# Altium PCB Advanced Clock.PcbDoc (part 6 of 7)
Units mil, origin at the board's own origin, x right, y up, seen from the top; angles counter-clockwise.
Board outline 3854 x 3880 mil, 2 copper layers (Top Layer, Bottom Layer); 117 components, 90 nets, 504 pads, 209 vias.
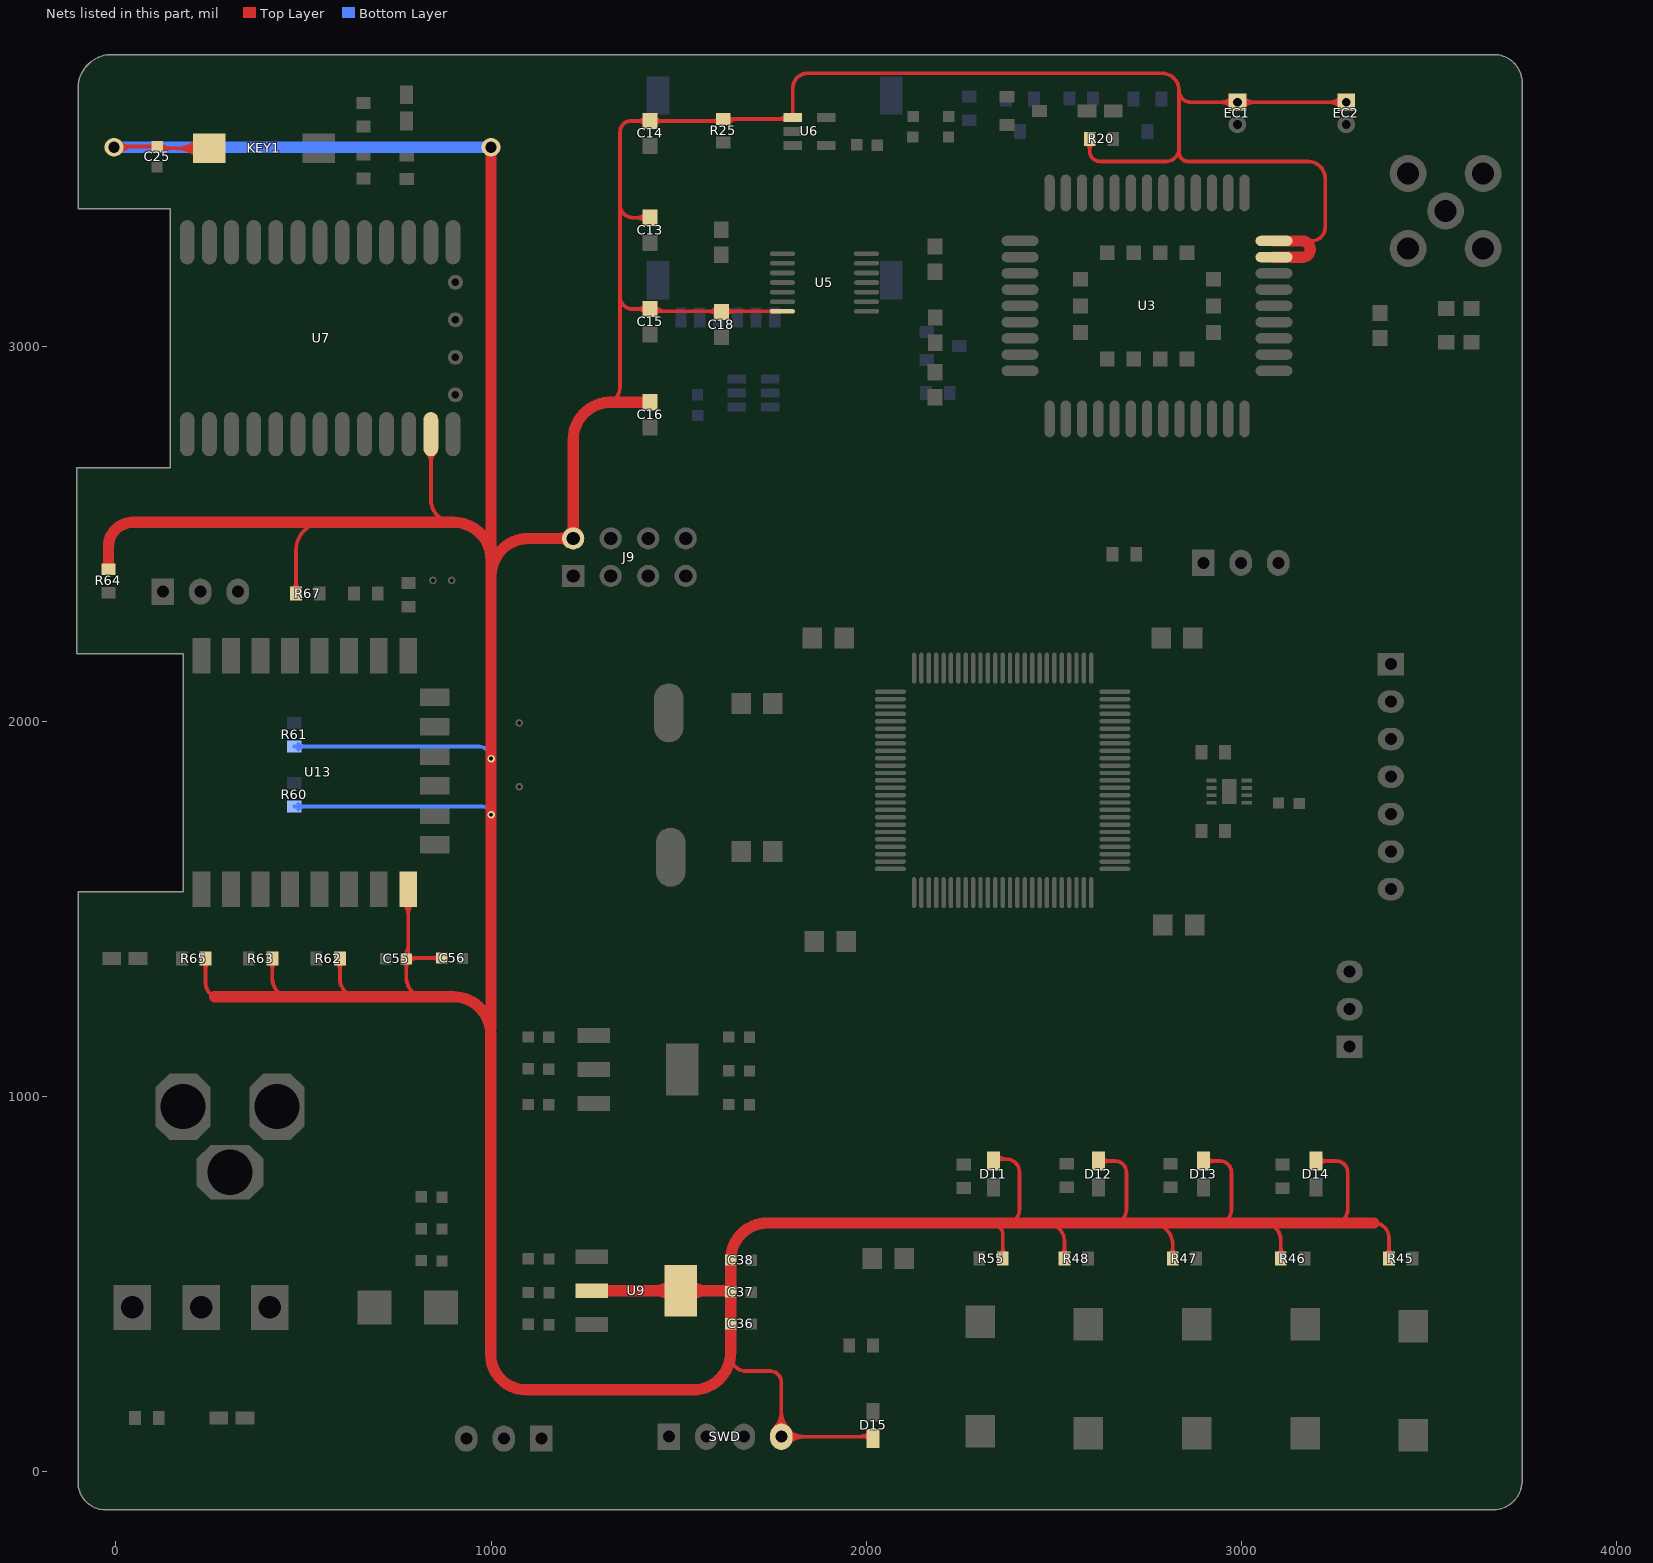
[diagram p6: the nets of this part, all layers, seen from the top]

## Via types
v1: diameter 20, hole 12, Top Layer to Bottom Layer, 133 vias
v2: diameter 20, hole 10, Top Layer to Bottom Layer, 30 vias
v3: diameter 15, hole 7, Top Layer to Bottom Layer, 26 vias
v4: diameter 30, hole 20, Top Layer to Bottom Layer, 11 vias
v5: diameter 138, hole 137.8, Top Layer to Bottom Layer, 4 vias
v6: diameter 50, hole 30, Top Layer to Bottom Layer, 4 vias
v7: diameter 40, hole 20, Top Layer to Bottom Layer, 1 vias

## Nets (pads, with @x,y where several pads share a name; then routed paths per layer and width w, separated by ;. In a path a pad name is that pad's centre, name@x,y a point inside that pad or via, vN(x,y) a via of type N, cw(c..) or ccw(c..) an arc to the next point about the centre after c; other vN are vias at no path point) (continued)
VCC3V3: C13.2 C14.2 C15.2 C16.2 C18.1 C25.2 C36.2 C37.2 C38.2 C55.2 C56.2 D11.A D12.A D13.A D14.A D15.A EC1.1 EC2.1 J9.2 KEY1.1 R20.2 R25.1 R45.1 R46.1 R47.1 R48.1 R55.2 R60.2 R61.2 R62.2 R63.2 R64.1 R65.1 R67.1 SWD.4 U3.43 U3.44 U5.14 U6.1 U7.12 U9.2 U9.4 U13.16 | length 34932.7
  Top Layer w10: v6@-2.79,3532.21 C25.2@110.35,3532.21 ; C25.2@115.57,3527 KEY1.1@249,3527 ; R65.1@239,1367 239,1302 ccw(c279,1302) 263.24,1265.23 ; R63.2@416.99,1367 416.99,1314.01 ccw(c469,1314.01) 450.95,1265.23 ; R67.1@480,2340 480,2455 cw(c555,2455) 555,2530 ; R62.2@596.99,1367 596.99,1314.01 ccw(c649,1314.01) 630.95,1265.23 ; C55.2@774.21,1365.65 774.21,1316.79 ccw(c829,1316.79) 810.45,1265.23 ; C55.2@778.53,1368.35 C56.2@868.79,1368.35 ; C55.2@779,1370.43 U13.16@779,1552.08 ; U7.12@839.61,2765 839.61,2590.39 ccw(c900,2590.39) 900,2530 ; 1301.95,2848.71 ccw(c1301.95,2890.76) 1312,2849.93 ccw(c1301.95,2890.76) 1344,2890.76 1344,3132 ; C15.2@1423.83,3098.51 1377.49,3098.51 cw(c1377.49,3132) 1344,3132 ; C13.2@1423.83,3342 1379,3342 cw(c1379,3377) 1344,3377 ; C15.2@1429.9,3092.43 U5.14@1776.8,3092.43 ; R25.1@1603,3600.18 C14.2@1423.83,3600.18 1373.23,3600.18 ccw(c1373.23,3570.95) 1344,3570.95 1344,3377 ; R25.1@1619,3605.18 U6.1@1791.63,3605.18 ; 1638.79,308.21 ccw(c1680,308.21) 1680,267 1744,267 cw(c1744,237) 1774,237 SWD.4@1774,92 2013.75,92 cw(c2013.75,87) D15.A@2018.74,87 ; U6.1@1804.71,3609.4 1804.71,3687.71 cw(c1844,3687.71) 1844,3727 2789,3727 cw(c2789,3682) 2834,3682 ; 2332.49,662 cw(c2332.49,630) 2364.49,630 R55.2@2364.49,567 ; D11.A@2344.26,832 2374,832 ; 2374,662 ccw(c2374,697) 2409,697 2409,797 ccw(c2374,797) 2374,832 ; 2479,662 cw(c2479,612) 2529,612 R48.1@2529,567 ; R20.2@2596.01,3552 2596.01,3519.99 ccw(c2624,3519.99) 2624,3492 2800,3492 ccw(c2800,3526) 2834,3526 ; D12.A@2619.26,827 2664,827 cw(c2664,797) 2694,797 2694,697 cw(c2659,697) 2659,662 ; 2759,662 cw(c2759,603.67) 2817.33,603.67 R47.1@2817.33,567 ; D13.A@2899.26,827 2944,827 cw(c2944,797) 2974,797 2974,697 cw(c2939,697) 2939,662 ; 3059,662 cw(c3059,615.33) 3105.67,615.33 R46.1@3105.67,567 ; 3160.77,3280.23 3187.23,3280.23 ccw(c3187.23,3317) 3224,3317 3224,3446.19 ccw(c3178.19,3446.19) 3178.19,3492 2859,3492 cw(c2859,3517) 2834,3517 2834,3526 ; D14.A@3199.26,827 3254,827 cw(c3254,797) 3284,797 3284,697 cw(c3249,697) 3249,662 ; EC2.1@3280,3650 EC1.1@2990,3650 2866,3650 cw(c2866,3682) 2834,3682 ; 3354,662 cw(c3354,622) 3394,622 R45.1@3394,567 ; v6@2.07,3522.93 cw(c24.48,3500.52) 24.48,3532.21 ; v6@2.07,3522.93 cw(c24.48,3500.52) 24.48,3532.21 ; v6@2.07,3522.93 cw(c24.48,3500.52) 24.48,3532.21 ; v6@2.07,3522.93 cw(c24.48,3500.52) 24.48,3532.21 ; v6@2.07,3522.93 cw(c24.48,3500.52) 24.48,3532.21 ; v6@9.14,3515.86 cw(c48.63,3476.37) 48.63,3532.21 ; v6@9.14,3515.86 cw(c48.63,3476.37) 48.63,3532.21 ; v6@9.14,3515.86 cw(c48.63,3476.37) 48.63,3532.21 ; v6@9.14,3515.86 cw(c48.63,3476.37) 48.63,3532.21 ; v6@9.14,3515.86 cw(c48.63,3476.37) 48.63,3532.21 ; v6@9.14,3544.14 ccw(c37.94,3572.94) 37.94,3532.21 ; v6@9.14,3544.14 ccw(c37.94,3572.94) 37.94,3532.21 ; v6@9.14,3544.14 ccw(c37.94,3572.94) 37.94,3532.21 ; v6@9.14,3544.14 ccw(c37.94,3572.94) 37.94,3532.21 ; v6@9.14,3544.14 ccw(c37.94,3572.94) 37.94,3532.21 ; 86.21,3532.21 cw(c86.21,3508.07) C25.2@103.28,3525.14 ; 86.21,3532.21 ccw(c86.21,3556.35) C25.2@103.28,3539.28 ; 86.21,3532.21 cw(c86.21,3508.07) C25.2@103.28,3525.14 ; 86.21,3532.21 ccw(c86.21,3556.35) C25.2@103.28,3539.28 ; 86.21,3532.21 cw(c86.21,3508.07) C25.2@103.28,3525.14 ; 86.21,3532.21 ccw(c86.21,3556.35) C25.2@103.28,3539.28 ; 86.21,3532.21 cw(c86.21,3508.07) C25.2@103.28,3525.14 ; 86.21,3532.21 ccw(c86.21,3556.35) C25.2@103.28,3539.28 ; 86.21,3532.21 cw(c86.21,3508.07) C25.2@103.28,3525.14 ; 86.21,3532.21 ccw(c86.21,3556.35) C25.2@103.28,3539.28 ; 86.21,3532.21 cw(c86.21,3508.07) C25.2@103.28,3525.14 ; 86.21,3532.21 ccw(c86.21,3556.35) C25.2@103.28,3539.28 ; 86.21,3532.21 cw(c86.21,3508.07) C25.2@103.28,3525.14 ; 86.21,3532.21 ccw(c86.21,3556.35) C25.2@103.28,3539.28 ; 86.21,3532.21 cw(c86.21,3508.07) C25.2@103.28,3525.14 ; 86.21,3532.21 ccw(c86.21,3556.35) C25.2@103.28,3539.28 ; C25.2@117.43,3539.28 ccw(c147.08,3568.94) 147.08,3527 ; C25.2@117.43,3539.28 ccw(c147.08,3568.94) 147.08,3527 ; C25.2@117.43,3539.28 ccw(c147.08,3568.94) 147.08,3527 ; C25.2@117.43,3539.28 ccw(c147.08,3568.94) 147.08,3527 ; C25.2@117.43,3539.28 ccw(c147.08,3568.94) 147.08,3527 ; 162.09,3527 cw(c162.09,3444.02) KEY1.1@220.76,3502.7 ; 162.09,3527 ccw(c162.09,3609.98) KEY1.1@220.76,3551.3 ; 162.09,3527 cw(c162.09,3444.02) KEY1.1@220.76,3502.7 ; 162.09,3527 ccw(c162.09,3609.98) KEY1.1@220.76,3551.3 ; 162.09,3527 cw(c162.09,3444.02) KEY1.1@220.76,3502.7 ; 162.09,3527 ccw(c162.09,3609.98) KEY1.1@220.76,3551.3 ; 162.09,3527 cw(c162.09,3444.02) KEY1.1@220.76,3502.7 ; 162.09,3527 ccw(c162.09,3609.98) KEY1.1@220.76,3551.3 ; 162.09,3527 cw(c162.09,3444.02) KEY1.1@220.76,3502.7 ; 162.09,3527 ccw(c162.09,3609.98) KEY1.1@220.76,3551.3 ; 186.23,3527 cw(c186.23,3468.17) KEY1.1@227.83,3509.77 ; 186.23,3527 ccw(c186.23,3585.83) KEY1.1@227.83,3544.23 ; 186.23,3527 cw(c186.23,3468.17) KEY1.1@227.83,3509.77 ; 186.23,3527 ccw(c186.23,3585.83) KEY1.1@227.83,3544.23 ; 186.23,3527 cw(c186.23,3468.17) KEY1.1@227.83,3509.77 ; 186.23,3527 ccw(c186.23,3585.83) KEY1.1@227.83,3544.23 ; 186.23,3527 cw(c186.23,3468.17) KEY1.1@227.83,3509.77 ; 186.23,3527 ccw(c186.23,3585.83) KEY1.1@227.83,3544.23 ; 186.23,3527 cw(c186.23,3468.17) KEY1.1@227.83,3509.77 ; 186.23,3527 ccw(c186.23,3585.83) KEY1.1@227.83,3544.23 ; R65.1@231.4,1356.15 cw(c213.05,1337.8) 239,1337.8 ; R65.1@231.4,1356.15 cw(c213.05,1337.8) 239,1337.8 ; R65.1@231.4,1356.15 cw(c213.05,1337.8) 239,1337.8 ; R65.1@231.4,1356.15 cw(c213.05,1337.8) 239,1337.8 ; R65.1@231.4,1356.15 cw(c213.05,1337.8) 239,1337.8 ; R65.1@231.4,1356.15 cw(c213.05,1337.8) 239,1337.8 ; R65.1@231.4,1356.15 cw(c213.05,1337.8) 239,1337.8 ; R65.1@231.4,1356.15 cw(c213.05,1337.8) 239,1337.8 ; 239,1337.8 cw(c264.95,1337.8) R65.1@246.6,1356.15 ; 239,1337.8 cw(c264.95,1337.8) R65.1@246.6,1356.15 ; 239,1337.8 cw(c264.95,1337.8) R65.1@246.6,1356.15 ; 239,1337.8 cw(c264.95,1337.8) R65.1@246.6,1356.15 ; 239,1337.8 cw(c264.95,1337.8) R65.1@246.6,1356.15 ; 239,1337.8 cw(c264.95,1337.8) R65.1@246.6,1356.15 ; 239,1337.8 cw(c264.95,1337.8) R65.1@246.6,1356.15 ; 239,1337.8 cw(c264.95,1337.8) R65.1@246.6,1356.15 ; R63.2@409.39,1356.15 cw(c391.04,1337.8) 416.99,1337.8 ; R63.2@409.39,1356.15 cw(c391.04,1337.8) 416.99,1337.8 ; R63.2@409.39,1356.15 cw(c391.04,1337.8) 416.99,1337.8 ; R63.2@409.39,1356.15 cw(c391.04,1337.8) 416.99,1337.8 ; R63.2@409.39,1356.15 cw(c391.04,1337.8) 416.99,1337.8 ; R63.2@409.39,1356.15 cw(c391.04,1337.8) 416.99,1337.8 ; R63.2@409.39,1356.15 cw(c391.04,1337.8) 416.99,1337.8 ; R63.2@409.39,1356.15 cw(c391.04,1337.8) 416.99,1337.8 ; 416.99,1337.8 cw(c442.94,1337.8) R63.2@424.59,1356.15 ; 416.99,1337.8 cw(c442.94,1337.8) R63.2@424.59,1356.15 ; 416.99,1337.8 cw(c442.94,1337.8) R63.2@424.59,1356.15 ; 416.99,1337.8 cw(c442.94,1337.8) R63.2@424.59,1356.15 ; 416.99,1337.8 cw(c442.94,1337.8) R63.2@424.59,1356.15 ; 416.99,1337.8 cw(c442.94,1337.8) R63.2@424.59,1356.15 ; 416.99,1337.8 cw(c442.94,1337.8) R63.2@424.59,1356.15 ; 416.99,1337.8 cw(c442.94,1337.8) R63.2@424.59,1356.15 ; R67.1@472.4,2350.85 ccw(c454.05,2369.2) 480,2369.2 ; R67.1@472.4,2350.85 ccw(c454.05,2369.2) 480,2369.2 ; R67.1@472.4,2350.85 ccw(c454.05,2369.2) 480,2369.2 ; R67.1@472.4,2350.85 ccw(c454.05,2369.2) 480,2369.2 ; R67.1@472.4,2350.85 ccw(c454.05,2369.2) 480,2369.2 ; R67.1@472.4,2350.85 ccw(c454.05,2369.2) 480,2369.2 ; R67.1@472.4,2350.85 ccw(c454.05,2369.2) 480,2369.2 ; R67.1@472.4,2350.85 ccw(c454.05,2369.2) 480,2369.2 ; 480,2369.2 ccw(c505.95,2369.2) R67.1@487.6,2350.85 ; 480,2369.2 ccw(c505.95,2369.2) R67.1@487.6,2350.85 ; 480,2369.2 ccw(c505.95,2369.2) R67.1@487.6,2350.85 ; 480,2369.2 ccw(c505.95,2369.2) R67.1@487.6,2350.85 ; 480,2369.2 ccw(c505.95,2369.2) R67.1@487.6,2350.85 ; 480,2369.2 ccw(c505.95,2369.2) R67.1@487.6,2350.85 ; 480,2369.2 ccw(c505.95,2369.2) R67.1@487.6,2350.85 ; 480,2369.2 ccw(c505.95,2369.2) R67.1@487.6,2350.85 ; R62.2@589.39,1356.15 cw(c571.04,1337.8) 596.99,1337.8 ; R62.2@589.39,1356.15 cw(c571.04,1337.8) 596.99,1337.8 ; R62.2@589.39,1356.15 cw(c571.04,1337.8) 596.99,1337.8 ; R62.2@589.39,1356.15 cw(c571.04,1337.8) 596.99,1337.8 ; R62.2@589.39,1356.15 cw(c571.04,1337.8) 596.99,1337.8 ; R62.2@589.39,1356.15 cw(c571.04,1337.8) 596.99,1337.8 ; R62.2@589.39,1356.15 cw(c571.04,1337.8) 596.99,1337.8 ; R62.2@589.39,1356.15 cw(c571.04,1337.8) 596.99,1337.8 ; 596.99,1337.8 cw(c622.94,1337.8) R62.2@604.59,1356.15 ; 596.99,1337.8 cw(c622.94,1337.8) R62.2@604.59,1356.15 ; 596.99,1337.8 cw(c622.94,1337.8) R62.2@604.59,1356.15 ; 596.99,1337.8 cw(c622.94,1337.8) R62.2@604.59,1356.15 ; 596.99,1337.8 cw(c622.94,1337.8) R62.2@604.59,1356.15 ; 596.99,1337.8 cw(c622.94,1337.8) R62.2@604.59,1356.15 ; 596.99,1337.8 cw(c622.94,1337.8) R62.2@604.59,1356.15 ; 596.99,1337.8 cw(c622.94,1337.8) R62.2@604.59,1356.15 ; U13.16@765.83,1515.29 cw(c734.04,1483.5) 779,1483.5 ; U13.16@765.83,1515.29 cw(c734.04,1483.5) 779,1483.5 ; U13.16@765.83,1515.29 cw(c734.04,1483.5) 779,1483.5 ; U13.16@765.83,1515.29 cw(c734.04,1483.5) 779,1483.5 ; U13.16@765.83,1515.29 cw(c734.04,1483.5) 779,1483.5 ; C55.2@767.14,1358.57 cw(c750.07,1341.5) 774.21,1341.5 ; C55.2@767.14,1358.57 cw(c750.07,1341.5) 774.21,1341.5 ; C55.2@767.14,1358.57 cw(c750.07,1341.5) 774.21,1341.5 ; C55.2@767.14,1358.57 cw(c750.07,1341.5) 774.21,1341.5 ; C55.2@767.14,1358.57 cw(c750.07,1341.5) 774.21,1341.5 ; C55.2@767.14,1358.57 cw(c750.07,1341.5) 774.21,1341.5 ; C55.2@767.14,1358.57 cw(c750.07,1341.5) 774.21,1341.5 ; C55.2@767.14,1358.57 cw(c750.07,1341.5) 774.21,1341.5 ; C55.2@767.14,1372.72 ccw(c738.51,1401.35) 779,1401.35 ; C55.2@767.14,1372.72 ccw(c738.51,1401.35) 779,1401.35 ; C55.2@767.14,1372.72 ccw(c738.51,1401.35) 779,1401.35 ; C55.2@767.14,1372.72 ccw(c738.51,1401.35) 779,1401.35 ; C55.2@767.14,1372.72 ccw(c738.51,1401.35) 779,1401.35 ; 774.21,1341.5 cw(c798.35,1341.5) C55.2@781.28,1358.57 ; 774.21,1341.5 cw(c798.35,1341.5) C55.2@781.28,1358.57 ; 774.21,1341.5 cw(c798.35,1341.5) C55.2@781.28,1358.57 ; 774.21,1341.5 cw(c798.35,1341.5) C55.2@781.28,1358.57 ; 774.21,1341.5 cw(c798.35,1341.5) C55.2@781.28,1358.57 ; 774.21,1341.5 cw(c798.35,1341.5) C55.2@781.28,1358.57 ; 774.21,1341.5 cw(c798.35,1341.5) C55.2@781.28,1358.57 ; 774.21,1341.5 cw(c798.35,1341.5) C55.2@781.28,1358.57 ; 779,1483.5 cw(c823.96,1483.5) U13.16@792.17,1515.29 ; 779,1483.5 cw(c823.96,1483.5) U13.16@792.17,1515.29 ; 779,1483.5 cw(c823.96,1483.5) U13.16@792.17,1515.29 ; 779,1483.5 cw(c823.96,1483.5) U13.16@792.17,1515.29 ; 779,1483.5 cw(c823.96,1483.5) U13.16@792.17,1515.29 ; C55.2@781.28,1358.57 cw(c804.89,1334.96) 804.89,1368.35 ; C55.2@781.28,1358.57 cw(c804.89,1334.96) 804.89,1368.35 ; C55.2@781.28,1358.57 cw(c804.89,1334.96) 804.89,1368.35 ; C55.2@781.28,1358.57 cw(c804.89,1334.96) 804.89,1368.35 ; C55.2@781.28,1358.57 cw(c804.89,1334.96) 804.89,1368.35 ; C55.2@781.28,1372.72 ccw(c791.82,1383.25) 791.82,1368.35 ; C55.2@781.28,1372.72 ccw(c791.82,1383.25) 791.82,1368.35 ; C55.2@781.28,1372.72 ccw(c791.82,1383.25) 791.82,1368.35 ; C55.2@781.28,1372.72 ccw(c791.82,1383.25) 791.82,1368.35 ; C55.2@781.28,1372.72 ccw(c791.82,1383.25) 791.82,1368.35 ; U7.12@829.22,2715.25 cw(c804.15,2690.18) 839.61,2690.18 ; U7.12@829.22,2715.25 cw(c804.15,2690.18) 839.61,2690.18 ; U7.12@829.22,2715.25 cw(c804.15,2690.18) 839.61,2690.18 ; U7.12@829.22,2715.25 cw(c804.15,2690.18) 839.61,2690.18 ; U7.12@829.22,2715.25 cw(c804.15,2690.18) 839.61,2690.18 ; 839.61,2690.18 cw(c875.06,2690.18) U7.12@849.99,2715.25 ; 839.61,2690.18 cw(c875.06,2690.18) U7.12@849.99,2715.25 ; 839.61,2690.18 cw(c875.06,2690.18) U7.12@849.99,2715.25 ; 839.61,2690.18 cw(c875.06,2690.18) U7.12@849.99,2715.25 ; 839.61,2690.18 cw(c875.06,2690.18) U7.12@849.99,2715.25 ; 844.65,1368.35 cw(c844.65,1344.21) C56.2@861.72,1361.28 ; 844.65,1368.35 ccw(c844.65,1392.5) C56.2@861.72,1375.43 ; 844.65,1368.35 cw(c844.65,1344.21) C56.2@861.72,1361.28 ; 844.65,1368.35 ccw(c844.65,1392.5) C56.2@861.72,1375.43 ; 844.65,1368.35 cw(c844.65,1344.21) C56.2@861.72,1361.28 ; 844.65,1368.35 ccw(c844.65,1392.5) C56.2@861.72,1375.43 ; 844.65,1368.35 cw(c844.65,1344.21) C56.2@861.72,1361.28 ; 844.65,1368.35 ccw(c844.65,1392.5) C56.2@861.72,1375.43 ; 844.65,1368.35 cw(c844.65,1344.21) C56.2@861.72,1361.28 ; 844.65,1368.35 ccw(c844.65,1392.5) C56.2@861.72,1375.43 ; 844.65,1368.35 cw(c844.65,1344.21) C56.2@861.72,1361.28 ; 844.65,1368.35 ccw(c844.65,1392.5) C56.2@861.72,1375.43 ; 844.65,1368.35 cw(c844.65,1344.21) C56.2@861.72,1361.28 ; 844.65,1368.35 ccw(c844.65,1392.5) C56.2@861.72,1375.43 ; 844.65,1368.35 cw(c844.65,1344.21) C56.2@861.72,1361.28 ; 844.65,1368.35 ccw(c844.65,1392.5) C56.2@861.72,1375.43 ; 1344,3132 1344,3377 ; 1388,3342 cw(c1388,3306.02) C13.2@1413.44,3331.46 ; 1388,3342 cw(c1388,3306.02) C13.2@1413.44,3331.46 ; 1388,3342 cw(c1388,3306.02) C13.2@1413.44,3331.46 ; 1388,3342 cw(c1388,3306.02) C13.2@1413.44,3331.46 ; 1388,3342 cw(c1388,3306.02) C13.2@1413.44,3331.46 ; 1388.37,3098.51 cw(c1388.37,3063.06) C15.2@1413.44,3088.13 ; 1388.37,3098.51 ccw(c1388.37,3133.96) C15.2@1413.44,3108.9 ; 1388.37,3098.51 cw(c1388.37,3063.06) C15.2@1413.44,3088.13 ; 1388.37,3098.51 ccw(c1388.37,3133.96) C15.2@1413.44,3108.9 ; 1388.37,3098.51 cw(c1388.37,3063.06) C15.2@1413.44,3088.13 ; 1388.37,3098.51 ccw(c1388.37,3133.96) C15.2@1413.44,3108.9 ; 1388.37,3098.51 cw(c1388.37,3063.06) C15.2@1413.44,3088.13 ; 1388.37,3098.51 ccw(c1388.37,3133.96) C15.2@1413.44,3108.9 ; 1388.37,3098.51 cw(c1388.37,3063.06) C15.2@1413.44,3088.13 ; 1388.37,3098.51 ccw(c1388.37,3133.96) C15.2@1413.44,3108.9 ; 1388.37,3600.18 cw(c1388.37,3564.73) C14.2@1413.44,3589.79 ; 1388.37,3600.18 ccw(c1388.37,3635.63) C14.2@1413.44,3610.56 ; 1388.37,3600.18 cw(c1388.37,3564.73) C14.2@1413.44,3589.79 ; 1388.37,3600.18 ccw(c1388.37,3635.63) C14.2@1413.44,3610.56 ; 1388.37,3600.18 cw(c1388.37,3564.73) C14.2@1413.44,3589.79 ; 1388.37,3600.18 ccw(c1388.37,3635.63) C14.2@1413.44,3610.56 ; 1388.37,3600.18 cw(c1388.37,3564.73) C14.2@1413.44,3589.79 ; 1388.37,3600.18 ccw(c1388.37,3635.63) C14.2@1413.44,3610.56 ; 1388.37,3600.18 cw(c1388.37,3564.73) C14.2@1413.44,3589.79 ; 1388.37,3600.18 ccw(c1388.37,3635.63) C14.2@1413.44,3610.56 ; 1388.75,3342 ccw(c1388.75,3376.92) C13.2@1413.44,3352.23 ; 1388.75,3342 ccw(c1388.75,3376.92) C13.2@1413.44,3352.23 ; 1388.75,3342 ccw(c1388.75,3376.92) C13.2@1413.44,3352.23 ; 1388.75,3342 ccw(c1388.75,3376.92) C13.2@1413.44,3352.23 ; 1388.75,3342 ccw(c1388.75,3376.92) C13.2@1413.44,3352.23 ; C15.2@1427.14,3099.86 ccw(c1445.06,3117.78) 1445.06,3092.43 ; C15.2@1427.14,3099.86 ccw(c1445.06,3117.78) 1445.06,3092.43 ; C15.2@1427.14,3099.86 ccw(c1445.06,3117.78) 1445.06,3092.43 ; C15.2@1427.14,3099.86 ccw(c1445.06,3117.78) 1445.06,3092.43 ; C15.2@1427.14,3099.86 ccw(c1445.06,3117.78) 1445.06,3092.43 ; C15.2@1434.21,3086.16 cw(c1449.35,3071.01) 1449.35,3092.43 ; C15.2@1434.21,3086.16 cw(c1449.35,3071.01) 1449.35,3092.43 ; C15.2@1434.21,3086.16 cw(c1449.35,3071.01) 1449.35,3092.43 ; C15.2@1434.21,3086.16 cw(c1449.35,3071.01) 1449.35,3092.43 ; C15.2@1434.21,3086.16 cw(c1449.35,3071.01) 1449.35,3092.43 ; C15.2@1434.21,3106.93 ccw(c1469.2,3141.92) 1469.2,3092.43 ; C15.2@1434.21,3106.93 ccw(c1469.2,3141.92) 1469.2,3092.43 ; C15.2@1434.21,3106.93 ccw(c1469.2,3141.92) 1469.2,3092.43 ; C15.2@1434.21,3106.93 ccw(c1469.2,3141.92) 1469.2,3092.43 ; C15.2@1434.21,3106.93 ccw(c1469.2,3141.92) 1469.2,3092.43 ; C14.2@1434.21,3589.79 cw(c1459.28,3564.73) 1459.28,3600.18 ; C14.2@1434.21,3589.79 cw(c1459.28,3564.73) 1459.28,3600.18 ; C14.2@1434.21,3589.79 cw(c1459.28,3564.73) 1459.28,3600.18 ; C14.2@1434.21,3589.79 cw(c1459.28,3564.73) 1459.28,3600.18 ; C14.2@1434.21,3589.79 cw(c1459.28,3564.73) 1459.28,3600.18 ; C14.2@1434.21,3610.56 ccw(c1459.28,3635.63) 1459.28,3600.18 ; C14.2@1434.21,3610.56 ccw(c1459.28,3635.63) 1459.28,3600.18 ; C14.2@1434.21,3610.56 ccw(c1459.28,3635.63) 1459.28,3600.18 ; C14.2@1434.21,3610.56 ccw(c1459.28,3635.63) 1459.28,3600.18 ; C14.2@1434.21,3610.56 ccw(c1459.28,3635.63) 1459.28,3600.18 ; 1578.03,3092.43 ccw(c1578.03,3128.86) C18.1@1603.79,3103.1 ; 1578.03,3092.43 ccw(c1578.03,3128.86) C18.1@1603.79,3103.1 ; 1578.03,3092.43 ccw(c1578.03,3128.86) C18.1@1603.79,3103.1 ; 1578.03,3092.43 ccw(c1578.03,3128.86) C18.1@1603.79,3103.1 ; 1578.03,3092.43 ccw(c1578.03,3128.86) C18.1@1603.79,3103.1 ; 1579.41,3092.43 cw(c1579.41,3057.95) C18.1@1603.79,3082.33 ; 1579.41,3092.43 cw(c1579.41,3057.95) C18.1@1603.79,3082.33 ; 1579.41,3092.43 cw(c1579.41,3057.95) C18.1@1603.79,3082.33 ; 1579.41,3092.43 cw(c1579.41,3057.95) C18.1@1603.79,3082.33 ; 1579.41,3092.43 cw(c1579.41,3057.95) C18.1@1603.79,3082.33 ; 1589.8,3600.18 cw(c1589.8,3574.23) R25.1@1608.15,3592.58 ; 1589.8,3600.18 ccw(c1589.8,3626.13) R25.1@1608.15,3607.78 ; 1589.8,3600.18 cw(c1589.8,3574.23) R25.1@1608.15,3592.58 ; 1589.8,3600.18 ccw(c1589.8,3626.13) R25.1@1608.15,3607.78 ; 1589.8,3600.18 cw(c1589.8,3574.23) R25.1@1608.15,3592.58 ; 1589.8,3600.18 ccw(c1589.8,3626.13) R25.1@1608.15,3607.78 ; 1589.8,3600.18 cw(c1589.8,3574.23) R25.1@1608.15,3592.58 ; 1589.8,3600.18 ccw(c1589.8,3626.13) R25.1@1608.15,3607.78 ; 1589.8,3600.18 cw(c1589.8,3574.23) R25.1@1608.15,3592.58 ; 1589.8,3600.18 ccw(c1589.8,3626.13) R25.1@1608.15,3607.78 ; 1589.8,3600.18 cw(c1589.8,3574.23) R25.1@1608.15,3592.58 ; 1589.8,3600.18 ccw(c1589.8,3626.13) R25.1@1608.15,3607.78 ; 1589.8,3600.18 cw(c1589.8,3574.23) R25.1@1608.15,3592.58 ; 1589.8,3600.18 ccw(c1589.8,3626.13) R25.1@1608.15,3607.78 ; 1589.8,3600.18 cw(c1589.8,3574.23) R25.1@1608.15,3592.58 ; 1589.8,3600.18 ccw(c1589.8,3626.13) R25.1@1608.15,3607.78 ; C18.1@1624.56,3082.33 cw(c1648.94,3057.95) 1648.94,3092.43 ; C18.1@1624.56,3082.33 cw(c1648.94,3057.95) 1648.94,3092.43 ; C18.1@1624.56,3082.33 cw(c1648.94,3057.95) 1648.94,3092.43 ; C18.1@1624.56,3082.33 cw(c1648.94,3057.95) 1648.94,3092.43 ; C18.1@1624.56,3082.33 cw(c1648.94,3057.95) 1648.94,3092.43 ; C18.1@1624.56,3103.1 ccw(c1650.31,3128.86) 1650.31,3092.43 ; C18.1@1624.56,3103.1 ccw(c1650.31,3128.86) 1650.31,3092.43 ; C18.1@1624.56,3103.1 ccw(c1650.31,3128.86) 1650.31,3092.43 ; C18.1@1624.56,3103.1 ccw(c1650.31,3128.86) 1650.31,3092.43 ; C18.1@1624.56,3103.1 ccw(c1650.31,3128.86) 1650.31,3092.43 ; R25.1@1629.85,3592.58 cw(c1660.27,3562.16) 1660.27,3605.18 ; R25.1@1629.85,3592.58 cw(c1660.27,3562.16) 1660.27,3605.18 ; R25.1@1629.85,3592.58 cw(c1660.27,3562.16) 1660.27,3605.18 ; R25.1@1629.85,3592.58 cw(c1660.27,3562.16) 1660.27,3605.18 ; R25.1@1629.85,3592.58 cw(c1660.27,3562.16) 1660.27,3605.18 ; SWD.4@1756.32,114.68 ccw(c1713.64,157.36) 1774,157.36 ; SWD.4@1756.32,114.68 ccw(c1713.64,157.36) 1774,157.36 ; SWD.4@1756.32,114.68 ccw(c1713.64,157.36) 1774,157.36 ; SWD.4@1756.32,114.68 ccw(c1713.64,157.36) 1774,157.36 ; SWD.4@1756.32,114.68 ccw(c1713.64,157.36) 1774,157.36 ; SWD.4@1763.39,107.61 ccw(c1737.79,133.21) 1774,133.21 ; SWD.4@1763.39,107.61 ccw(c1737.79,133.21) 1774,133.21 ; SWD.4@1763.39,107.61 ccw(c1737.79,133.21) 1774,133.21 ; SWD.4@1763.39,107.61 ccw(c1737.79,133.21) 1774,133.21 ; SWD.4@1763.39,107.61 ccw(c1737.79,133.21) 1774,133.21 ; 1765.28,3605.18 ccw(c1765.28,3636.04) U6.1@1787.1,3614.22 ; 1765.28,3605.18 ccw(c1765.28,3636.04) U6.1@1787.1,3614.22 ; 1765.28,3605.18 ccw(c1765.28,3636.04) U6.1@1787.1,3614.22 ; 1765.28,3605.18 ccw(c1765.28,3636.04) U6.1@1787.1,3614.22 ; 1765.28,3605.18 ccw(c1765.28,3636.04) U6.1@1787.1,3614.22 ; 1774,133.21 ccw(c1810.21,133.21) SWD.4@1784.61,107.61 ; 1774,133.21 ccw(c1810.21,133.21) SWD.4@1784.61,107.61 ; 1774,133.21 ccw(c1810.21,133.21) SWD.4@1784.61,107.61 ; 1774,133.21 ccw(c1810.21,133.21) SWD.4@1784.61,107.61 ; 1774,133.21 ccw(c1810.21,133.21) SWD.4@1784.61,107.61 ; 1774,157.36 ccw(c1834.36,157.36) SWD.4@1791.68,114.68 ; 1774,157.36 ccw(c1834.36,157.36) SWD.4@1791.68,114.68 ; 1774,157.36 ccw(c1834.36,157.36) SWD.4@1791.68,114.68 ; 1774,157.36 ccw(c1834.36,157.36) SWD.4@1791.68,114.68 ; 1774,157.36 ccw(c1834.36,157.36) SWD.4@1791.68,114.68 ; 1776.55,3608.13 cw(c1780.12,3601.95) U6.1@1786.16,3605.76 ; 1776.55,3608.13 cw(c1780.12,3601.95) U6.1@1786.16,3605.76 ; 1776.55,3608.13 cw(c1780.12,3601.95) U6.1@1786.16,3605.76 ; 1776.55,3608.13 cw(c1780.12,3601.95) U6.1@1786.16,3605.76 ; 1776.55,3608.13 cw(c1780.12,3601.95) U6.1@1786.16,3605.76 ; 1776.55,3608.13 cw(c1780.12,3601.95) U6.1@1786.16,3605.76 ; 1776.55,3608.13 cw(c1780.12,3601.95) U6.1@1786.16,3605.76 ; 1776.55,3608.13 cw(c1780.12,3601.95) U6.1@1786.16,3605.76 ; 1776.55,3608.13 cw(c1780.12,3601.95) U6.1@1786.16,3605.76 ; 1776.55,3608.13 cw(c1780.12,3601.95) U6.1@1786.16,3605.76 ; SWD.4@1784.61,81.39 cw(c1810.21,55.79) 1810.21,92 ; SWD.4@1784.61,81.39 cw(c1810.21,55.79) 1810.21,92 ; SWD.4@1784.61,81.39 cw(c1810.21,55.79) 1810.21,92 ; SWD.4@1784.61,81.39 cw(c1810.21,55.79) 1810.21,92 ; SWD.4@1784.61,81.39 cw(c1810.21,55.79) 1810.21,92 ; SWD.4@1784.61,102.61 ccw(c1810.21,128.21) 1810.21,92 ; SWD.4@1784.61,102.61 ccw(c1810.21,128.21) 1810.21,92 ; SWD.4@1784.61,102.61 ccw(c1810.21,128.21) 1810.21,92 ; SWD.4@1784.61,102.61 ccw(c1810.21,128.21) 1810.21,92 ; SWD.4@1784.61,102.61 ccw(c1810.21,128.21) 1810.21,92 ; SWD.4@1791.68,74.32 cw(c1834.36,31.64) 1834.36,92 ; SWD.4@1791.68,74.32 cw(c1834.36,31.64) 1834.36,92 ; SWD.4@1791.68,74.32 cw(c1834.36,31.64) 1834.36,92 ; SWD.4@1791.68,74.32 cw(c1834.36,31.64) 1834.36,92 ; SWD.4@1791.68,74.32 cw(c1834.36,31.64) 1834.36,92 ; SWD.4@1791.68,109.68 ccw(c1834.36,152.36) 1834.36,92 ; SWD.4@1791.68,109.68 ccw(c1834.36,152.36) 1834.36,92 ; SWD.4@1791.68,109.68 ccw(c1834.36,152.36) 1834.36,92 ; SWD.4@1791.68,109.68 ccw(c1834.36,152.36) 1834.36,92 ; SWD.4@1791.68,109.68 ccw(c1834.36,152.36) 1834.36,92 ; 1982.52,92 ccw(c1982.52,130.73) D15.A@2009.91,103.34 ; 1982.52,92 ccw(c1982.52,130.73) D15.A@2009.91,103.34 ; 1982.52,92 ccw(c1982.52,130.73) D15.A@2009.91,103.34 ; 1982.52,92 ccw(c1982.52,130.73) D15.A@2009.91,103.34 ; 1982.52,92 ccw(c1982.52,130.73) D15.A@2009.91,103.34 ; 1994.61,92 cw(c1994.61,70.37) D15.A@2009.91,85.67 ; 1994.61,92 cw(c1994.61,70.37) D15.A@2009.91,85.67 ; 1994.61,92 cw(c1994.61,70.37) D15.A@2009.91,85.67 ; 1994.61,92 cw(c1994.61,70.37) D15.A@2009.91,85.67 ; 1994.61,92 cw(c1994.61,70.37) D15.A@2009.91,85.67 ; D11.A@2348.09,825.66 cw(c2363.41,810.34) 2363.41,832 ; D11.A@2348.09,825.66 cw(c2363.41,810.34) 2363.41,832 ; D11.A@2348.09,825.66 cw(c2363.41,810.34) 2363.41,832 ; D11.A@2348.09,825.66 cw(c2363.41,810.34) 2363.41,832 ; D11.A@2348.09,825.66 cw(c2363.41,810.34) 2363.41,832 ; D11.A@2348.35,843.07 ccw(c2374,867.25) 2374,832 ; D11.A@2348.35,843.07 ccw(c2374,867.25) 2374,832 ; D11.A@2348.35,843.07 ccw(c2374,867.25) 2374,832 ; D11.A@2348.35,843.07 ccw(c2374,867.25) 2374,832 ; D11.A@2348.35,843.07 ccw(c2374,867.25) 2374,832 ; R55.2@2356.89,577.85 ccw(c2338.54,596.2) 2364.49,596.2 ; R55.2@2356.89,577.85 ccw(c2338.54,596.2) 2364.49,596.2 ; R55.2@2356.89,577.85 ccw(c2338.54,596.2) 2364.49,596.2 ; 2364.49,596.2 ccw(c2390.44,596.2) R55.2@2372.09,577.85 ; 2364.49,596.2 ccw(c2390.44,596.2) R55.2@2372.09,577.85 ; 2364.49,596.2 ccw(c2390.44,596.2) R55.2@2372.09,577.85 ; R48.1@2521.4,577.85 ccw(c2503.05,596.2) 2529,596.2 ; R48.1@2521.4,577.85 ccw(c2503.05,596.2) 2529,596.2 ; R48.1@2521.4,577.85 ccw(c2503.05,596.2) 2529,596.2 ; R48.1@2521.4,577.85 ccw(c2503.05,596.2) 2529,596.2 ; R48.1@2521.4,577.85 ccw(c2503.05,596.2) 2529,596.2 ; R48.1@2521.4,577.85 ccw(c2503.05,596.2) 2529,596.2 ; R48.1@2521.4,577.85 ccw(c2503.05,596.2) 2529,596.2 ; R48.1@2521.4,577.85 ccw(c2503.05,596.2) 2529,596.2 ; 2529,596.2 ccw(c2554.95,596.2) R48.1@2536.6,577.85 ; 2529,596.2 ccw(c2554.95,596.2) R48.1@2536.6,577.85 ; 2529,596.2 ccw(c2554.95,596.2) R48.1@2536.6,577.85 ; 2529,596.2 ccw(c2554.95,596.2) R48.1@2536.6,577.85 ; 2529,596.2 ccw(c2554.95,596.2) R48.1@2536.6,577.85 ; 2529,596.2 ccw(c2554.95,596.2) R48.1@2536.6,577.85 ; 2529,596.2 ccw(c2554.95,596.2) R48.1@2536.6,577.85 ; 2529,596.2 ccw(c2554.95,596.2) R48.1@2536.6,577.85 ; R20.2@2588.41,3541.15 cw(c2570.06,3522.8) 2596.01,3522.8 ; R20.2@2588.41,3541.15 cw(c2570.06,3522.8) 2596.01,3522.8 ; R20.2@2588.41,3541.15 cw(c2570.06,3522.8) 2596.01,3522.8 ; R20.2@2588.41,3541.15 cw(c2570.06,3522.8) 2596.01,3522.8 ; R20.2@2588.41,3541.15 cw(c2570.06,3522.8) 2596.01,3522.8 ; R20.2@2588.41,3541.15 cw(c2570.06,3522.8) 2596.01,3522.8 ; R20.2@2588.41,3541.15 cw(c2570.06,3522.8) 2596.01,3522.8 ; R20.2@2588.41,3541.15 cw(c2570.06,3522.8) 2596.01,3522.8 ; 2596.01,3522.8 cw(c2621.96,3522.8) R20.2@2603.61,3541.15 ; 2596.01,3522.8 cw(c2621.96,3522.8) R20.2@2603.61,3541.15 ; 2596.01,3522.8 cw(c2621.96,3522.8) R20.2@2603.61,3541.15 ; 2596.01,3522.8 cw(c2621.96,3522.8) R20.2@2603.61,3541.15 ; 2596.01,3522.8 cw(c2621.96,3522.8) R20.2@2603.61,3541.15 ; 2596.01,3522.8 cw(c2621.96,3522.8) R20.2@2603.61,3541.15 ; 2596.01,3522.8 cw(c2621.96,3522.8) R20.2@2603.61,3541.15 ; 2596.01,3522.8 cw(c2621.96,3522.8) R20.2@2603.61,3541.15 ; D12.A@2628.09,818.16 cw(c2649.43,796.82) 2649.43,827 ; D12.A@2628.09,818.16 cw(c2649.43,796.82) 2649.43,827 ; D12.A@2628.09,818.16 cw(c2649.43,796.82) 2649.43,827 ; D12.A@2628.09,818.16 cw(c2649.43,796.82) 2649.43,827 ; D12.A@2628.09,818.16 cw(c2649.43,796.82) 2649.43,827 ; D12.A@2628.09,818.16 cw(c2649.43,796.82) 2649.43,827 ; D12.A@2628.09,818.16 cw(c2649.43,796.82) 2649.43,827 ; D12.A@2628.09,818.16 cw(c2649.43,796.82) 2649.43,827 ; D12.A@2628.09,835.83 ccw(c2649.43,857.17) 2649.43,827 ; D12.A@2628.09,835.83 ccw(c2649.43,857.17) 2649.43,827 ; D12.A@2628.09,835.83 ccw(c2649.43,857.17) 2649.43,827 ; D12.A@2628.09,835.83 ccw(c2649.43,857.17) 2649.43,827 ; D12.A@2628.09,835.83 ccw(c2649.43,857.17) 2649.43,827 ; D12.A@2628.09,835.83 ccw(c2649.43,857.17) 2649.43,827 ; D12.A@2628.09,835.83 ccw(c2649.43,857.17) 2649.43,827 ; D12.A@2628.09,835.83 ccw(c2649.43,857.17) 2649.43,827 ; R47.1@2809.73,577.85 ccw(c2791.39,596.2) 2817.33,596.2 ; R47.1@2809.73,577.85 ccw(c2791.39,596.2) 2817.33,596.2 ; R47.1@2809.73,577.85 ccw(c2791.39,596.2) 2817.33,596.2 ; R47.1@2809.73,577.85 ccw(c2791.39,596.2) 2817.33,596.2 ; R47.1@2809.73,577.85 ccw(c2791.39,596.2) 2817.33,596.2 ; R47.1@2809.73,577.85 ccw(c2791.39,596.2) 2817.33,596.2 ; R47.1@2809.73,577.85 ccw(c2791.39,596.2) 2817.33,596.2 ; R47.1@2809.73,577.85 ccw(c2791.39,596.2) 2817.33,596.2 ; 2817.33,596.2 ccw(c2843.28,596.2) R47.1@2824.93,577.85 ; 2817.33,596.2 ccw(c2843.28,596.2) R47.1@2824.93,577.85 ; 2817.33,596.2 ccw(c2843.28,596.2) R47.1@2824.93,577.85 ; 2817.33,596.2 ccw(c2843.28,596.2) R47.1@2824.93,577.85 ; 2817.33,596.2 ccw(c2843.28,596.2) R47.1@2824.93,577.85 ; 2817.33,596.2 ccw(c2843.28,596.2) R47.1@2824.93,577.85 ; 2817.33,596.2 ccw(c2843.28,596.2) R47.1@2824.93,577.85 ; 2817.33,596.2 ccw(c2843.28,596.2) R47.1@2824.93,577.85 ; 2834,3526 2834,3682 ; D13.A@2908.09,818.16 cw(c2929.43,796.82) 2929.43,827 ; D13.A@2908.09,818.16 cw(c2929.43,796.82) 2929.43,827 ; D13.A@2908.09,818.16 cw(c2929.43,796.82) 2929.43,827 ; D13.A@2908.09,818.16 cw(c2929.43,796.82) 2929.43,827 ; D13.A@2908.09,818.16 cw(c2929.43,796.82) 2929.43,827 ; D13.A@2908.09,818.16 cw(c2929.43,796.82) 2929.43,827 ; D13.A@2908.09,818.16 cw(c2929.43,796.82) 2929.43,827 ; D13.A@2908.09,818.16 cw(c2929.43,796.82) 2929.43,827 ; D13.A@2908.09,835.83 ccw(c2929.43,857.17) 2929.43,827 ; D13.A@2908.09,835.83 ccw(c2929.43,857.17) 2929.43,827 ; D13.A@2908.09,835.83 ccw(c2929.43,857.17) 2929.43,827 ; D13.A@2908.09,835.83 ccw(c2929.43,857.17) 2929.43,827 ; D13.A@2908.09,835.83 ccw(c2929.43,857.17) 2929.43,827 ; D13.A@2908.09,835.83 ccw(c2929.43,857.17) 2929.43,827 ; D13.A@2908.09,835.83 ccw(c2929.43,857.17) 2929.43,827 ; D13.A@2908.09,835.83 ccw(c2929.43,857.17) 2929.43,827 ; 2945.04,3650 cw(c2945.04,3605.04) 2976.83,3636.83 ccw(c2945.04,3605.04) 2945.04,3650 ; 2945.04,3650 ccw(c2945.04,3694.96) 2976.83,3663.17 cw(c2945.04,3694.96) 2945.04,3650 ; 3034.96,3650 cw(c3034.96,3694.96) 3003.17,3663.17 ccw(c3034.96,3694.96) 3034.96,3650 ; 3034.96,3650 ccw(c3034.96,3605.04) 3003.17,3636.83 cw(c3034.96,3605.04) 3034.96,3650 ; R46.1@3098.07,577.85 ccw(c3079.72,596.2) 3105.67,596.2 ; R46.1@3098.07,577.85 ccw(c3079.72,596.2) 3105.67,596.2 ; R46.1@3098.07,577.85 ccw(c3079.72,596.2) 3105.67,596.2 ; R46.1@3098.07,577.85 ccw(c3079.72,596.2) 3105.67,596.2 ; R46.1@3098.07,577.85 ccw(c3079.72,596.2) 3105.67,596.2 ; R46.1@3098.07,577.85 ccw(c3079.72,596.2) 3105.67,596.2 ; R46.1@3098.07,577.85 ccw(c3079.72,596.2) 3105.67,596.2 ; R46.1@3098.07,577.85 ccw(c3079.72,596.2) 3105.67,596.2 ; 3105.67,596.2 ccw(c3131.61,596.2) R46.1@3113.27,577.85 ; 3105.67,596.2 ccw(c3131.61,596.2) R46.1@3113.27,577.85 ; 3105.67,596.2 ccw(c3131.61,596.2) R46.1@3113.27,577.85 ; 3105.67,596.2 ccw(c3131.61,596.2) R46.1@3113.27,577.85 ; 3105.67,596.2 ccw(c3131.61,596.2) R46.1@3113.27,577.85 ; 3105.67,596.2 ccw(c3131.61,596.2) R46.1@3113.27,577.85 ; 3105.67,596.2 ccw(c3131.61,596.2) R46.1@3113.27,577.85 ; 3105.67,596.2 ccw(c3131.61,596.2) R46.1@3113.27,577.85 ; D14.A@3208.09,818.16 cw(c3229.43,796.82) 3229.43,827 ; D14.A@3208.09,818.16 cw(c3229.43,796.82) 3229.43,827 ; D14.A@3208.09,818.16 cw(c3229.43,796.82) 3229.43,827 ; D14.A@3208.09,818.16 cw(c3229.43,796.82) 3229.43,827 ; D14.A@3208.09,818.16 cw(c3229.43,796.82) 3229.43,827 ; D14.A@3208.09,818.16 cw(c3229.43,796.82) 3229.43,827 ; D14.A@3208.09,818.16 cw(c3229.43,796.82) 3229.43,827 ; D14.A@3208.09,818.16 cw(c3229.43,796.82) 3229.43,827 ; D14.A@3208.09,835.83 ccw(c3229.43,857.17) 3229.43,827 ; D14.A@3208.09,835.83 ccw(c3229.43,857.17) 3229.43,827 ; D14.A@3208.09,835.83 ccw(c3229.43,857.17) 3229.43,827 ; D14.A@3208.09,835.83 ccw(c3229.43,857.17) 3229.43,827 ; D14.A@3208.09,835.83 ccw(c3229.43,857.17) 3229.43,827 ; D14.A@3208.09,835.83 ccw(c3229.43,857.17) 3229.43,827 ; D14.A@3208.09,835.83 ccw(c3229.43,857.17) 3229.43,827 ; D14.A@3208.09,835.83 ccw(c3229.43,857.17) 3229.43,827 ; 3235.04,3650 cw(c3235.04,3605.04) 3266.83,3636.83 ccw(c3235.04,3605.04) 3235.04,3650 ; 3235.04,3650 ccw(c3235.04,3694.96) 3266.83,3663.17 cw(c3235.04,3694.96) 3235.04,3650 ; R45.1@3386.4,577.85 ccw(c3368.05,596.2) 3394,596.2 ; R45.1@3386.4,577.85 ccw(c3368.05,596.2) 3394,596.2 ; R45.1@3386.4,577.85 ccw(c3368.05,596.2) 3394,596.2 ; R45.1@3386.4,577.85 ccw(c3368.05,596.2) 3394,596.2 ; R45.1@3386.4,577.85 ccw(c3368.05,596.2) 3394,596.2 ; R45.1@3386.4,577.85 ccw(c3368.05,596.2) 3394,596.2 ; R45.1@3386.4,577.85 ccw(c3368.05,596.2) 3394,596.2 ; R45.1@3386.4,577.85 ccw(c3368.05,596.2) 3394,596.2 ; 3394,596.2 ccw(c3419.95,596.2) R45.1@3401.6,577.85 ; 3394,596.2 ccw(c3419.95,596.2) R45.1@3401.6,577.85 ; 3394,596.2 ccw(c3419.95,596.2) R45.1@3401.6,577.85 ; 3394,596.2 ccw(c3419.95,596.2) R45.1@3401.6,577.85 ; 3394,596.2 ccw(c3419.95,596.2) R45.1@3401.6,577.85 ; 3394,596.2 ccw(c3419.95,596.2) R45.1@3401.6,577.85 ; 3394,596.2 ccw(c3419.95,596.2) R45.1@3401.6,577.85 ; 3394,596.2 ccw(c3419.95,596.2) R45.1@3401.6,577.85
  Top Layer w30: R64.1@-20,2405 -20,2465 cw(c45,2465) 45,2530 555,2530 900,2530 cw(c900,2430) 1000,2430 ; 263.24,1265.23 899,1265.23 cw(c899,1165.23) 999,1165.23 999,312 ccw(c1094,312) 1094,217 1538.79,217 ccw(c1538.79,317) 1638.79,317 C36.2@1638.79,393.35 C37.2@1638.79,478.35 ; 1000,1180 1000,2387 ; v6(1000,3530) 1000,2430 ; U9.2@1269,481.45 1635.69,481.45 cw(c1635.69,478.35) C37.2@1638.79,478.35 ; C16.2@1423.83,2850.18 1319,2850.18 ccw(c1319,2750.18) 1312,2849.93 ccw(c1319,2750.18) 1301.95,2848.71 ccw(c1319,2750.18) 1219,2750.18 J9.2@1219,2487 1100,2487 ccw(c1100,2387) 1000,2387 ; U3.43@3087.58,3236.92 3163.92,3236.92 ccw(c3163.92,3257) 3184,3257 ccw(c3160.77,3257) 3160.77,3280.23 ; U3.44@3087.58,3280.23 3160,3280.23 ; 3354,662 3249,662 3059,662 2939,662 2759,662 2659,662 2479,662 2374,662 1737.43,662 ccw(c1737.43,563.35) C38.2@1638.79,563.35 C37.2@1638.79,478.35 ; 1000,2387 1000,2430 ; 1183.93,2487 cw(c1183.93,2451.93) J9.2@1208.73,2476.73 ; 1183.93,2487 ccw(c1183.93,2522.07) J9.2@1208.73,2497.27 ; 1183.93,2487 cw(c1183.93,2451.93) J9.2@1208.73,2476.73 ; 1183.93,2487 ccw(c1183.93,2522.07) J9.2@1208.73,2497.27 ; 1183.93,2487 cw(c1183.93,2451.93) J9.2@1208.73,2476.73 ; 1183.93,2487 ccw(c1183.93,2522.07) J9.2@1208.73,2497.27 ; 1183.93,2487 cw(c1183.93,2451.93) J9.2@1208.73,2476.73 ; 1183.93,2487 ccw(c1183.93,2522.07) J9.2@1208.73,2497.27 ; 1183.93,2487 cw(c1183.93,2451.93) J9.2@1208.73,2476.73 ; 1183.93,2487 ccw(c1183.93,2522.07) J9.2@1208.73,2497.27 ; J9.2@1208.73,2497.27 ccw(c1183.93,2522.07) 1219,2522.07 ; J9.2@1208.73,2497.27 ccw(c1183.93,2522.07) 1219,2522.07 ; J9.2@1208.73,2497.27 ccw(c1183.93,2522.07) 1219,2522.07 ; J9.2@1208.73,2497.27 ccw(c1183.93,2522.07) 1219,2522.07 ; J9.2@1208.73,2497.27 ccw(c1183.93,2522.07) 1219,2522.07 ; 1219,2522.07 ccw(c1254.07,2522.07) J9.2@1229.27,2497.27 ; 1219,2522.07 ccw(c1254.07,2522.07) J9.2@1229.27,2497.27 ; 1219,2522.07 ccw(c1254.07,2522.07) J9.2@1229.27,2497.27 ; 1219,2522.07 ccw(c1254.07,2522.07) J9.2@1229.27,2497.27 ; 1219,2522.07 ccw(c1254.07,2522.07) J9.2@1229.27,2497.27 ; 1436.88,481.45 cw(c1436.88,413.11) U9.4@1485.2,461.43 ; 1436.88,481.45 ccw(c1436.88,549.79) U9.4@1485.2,501.46 ; 1436.88,481.45 cw(c1436.88,413.11) U9.4@1485.2,461.43 ; 1436.88,481.45 ccw(c1436.88,549.79) U9.4@1485.2,501.46 ; 1436.88,481.45 cw(c1436.88,413.11) U9.4@1485.2,461.43 ; 1436.88,481.45 ccw(c1436.88,549.79) U9.4@1485.2,501.46 ; 1436.88,481.45 cw(c1436.88,413.11) U9.4@1485.2,461.43 ; 1436.88,481.45 ccw(c1436.88,549.79) U9.4@1485.2,501.46 ; U9.4@1525.24,461.43 cw(c1573.56,413.11) 1573.56,481.45 ; U9.4@1525.24,461.43 cw(c1573.56,413.11) 1573.56,481.45 ; U9.4@1525.24,461.43 cw(c1573.56,413.11) 1573.56,481.45 ; U9.4@1525.24,461.43 cw(c1573.56,413.11) 1573.56,481.45 ; U9.4@1525.24,501.46 ccw(c1573.56,549.79) 1573.56,481.45 ; U9.4@1525.24,501.46 ccw(c1573.56,549.79) 1573.56,481.45 ; U9.4@1525.24,501.46 ccw(c1573.56,549.79) 1573.56,481.45 ; U9.4@1525.24,501.46 ccw(c1573.56,549.79) 1573.56,481.45
  Bottom Layer w10: R60.2@475,1772.01 977.99,1772.01 cw(c977.99,1750) v2(1000,1750) ; R61.2@475,1932.01 967.99,1932.01 cw(c967.99,1900) v2(1000,1900) ; R60.2@485.85,1764.41 cw(c504.2,1746.06) 504.2,1772.01 ; R60.2@485.85,1764.41 cw(c504.2,1746.06) 504.2,1772.01 ; R60.2@485.85,1764.41 cw(c504.2,1746.06) 504.2,1772.01 ; R60.2@485.85,1764.41 cw(c504.2,1746.06) 504.2,1772.01 ; R60.2@485.85,1764.41 cw(c504.2,1746.06) 504.2,1772.01 ; R60.2@485.85,1764.41 cw(c504.2,1746.06) 504.2,1772.01 ; R60.2@485.85,1764.41 cw(c504.2,1746.06) 504.2,1772.01 ; R60.2@485.85,1764.41 cw(c504.2,1746.06) 504.2,1772.01 ; R60.2@485.85,1779.61 ccw(c504.2,1797.96) 504.2,1772.01 ; R60.2@485.85,1779.61 ccw(c504.2,1797.96) 504.2,1772.01 ; R60.2@485.85,1779.61 ccw(c504.2,1797.96) 504.2,1772.01 ; R60.2@485.85,1779.61 ccw(c504.2,1797.96) 504.2,1772.01 ; R60.2@485.85,1779.61 ccw(c504.2,1797.96) 504.2,1772.01 ; R60.2@485.85,1779.61 ccw(c504.2,1797.96) 504.2,1772.01 ; R60.2@485.85,1779.61 ccw(c504.2,1797.96) 504.2,1772.01 ; R60.2@485.85,1779.61 ccw(c504.2,1797.96) 504.2,1772.01 ; R61.2@485.85,1924.41 cw(c504.2,1906.06) 504.2,1932.01 ; R61.2@485.85,1924.41 cw(c504.2,1906.06) 504.2,1932.01 ; R61.2@485.85,1924.41 cw(c504.2,1906.06) 504.2,1932.01 ; R61.2@485.85,1924.41 cw(c504.2,1906.06) 504.2,1932.01 ; R61.2@485.85,1924.41 cw(c504.2,1906.06) 504.2,1932.01 ; R61.2@485.85,1924.41 cw(c504.2,1906.06) 504.2,1932.01 ; R61.2@485.85,1924.41 cw(c504.2,1906.06) 504.2,1932.01 ; R61.2@485.85,1924.41 cw(c504.2,1906.06) 504.2,1932.01 ; R61.2@485.85,1939.61 ccw(c504.2,1957.96) 504.2,1932.01 ; R61.2@485.85,1939.61 ccw(c504.2,1957.96) 504.2,1932.01 ; R61.2@485.85,1939.61 ccw(c504.2,1957.96) 504.2,1932.01 ; R61.2@485.85,1939.61 ccw(c504.2,1957.96) 504.2,1932.01 ; R61.2@485.85,1939.61 ccw(c504.2,1957.96) 504.2,1932.01 ; R61.2@485.85,1939.61 ccw(c504.2,1957.96) 504.2,1932.01 ; R61.2@485.85,1939.61 ccw(c504.2,1957.96) 504.2,1932.01 ; R61.2@485.85,1939.61 ccw(c504.2,1957.96) 504.2,1932.01 ; v2@995.67,1902.5 ccw(c985.22,1908.54) 996.88,1911.66 ; v2@995.67,1902.5 ccw(c985.22,1908.54) 996.88,1911.66 ; v2@995.67,1902.5 ccw(c985.22,1908.54) 996.88,1911.66 ; v2@995.67,1902.5 ccw(c985.22,1908.54) 996.88,1911.66 ; v2@995.67,1902.5 ccw(c985.22,1908.54) 996.88,1911.66 ; v2@995.67,1902.5 ccw(c985.22,1908.54) 996.88,1911.66 ; v2@995.67,1902.5 ccw(c985.22,1908.54) 996.88,1911.66 ; v2@995.67,1902.5 ccw(c985.22,1908.54) 996.88,1911.66 ; v2@995.78,1752.68 ccw(c986.93,1758.29) 997.05,1761 ; v2@995.78,1752.68 ccw(c986.93,1758.29) 997.05,1761 ; v2@995.78,1752.68 ccw(c986.93,1758.29) 997.05,1761 ; v2@995.78,1752.68 ccw(c986.93,1758.29) 997.05,1761 ; v2@995.78,1752.68 ccw(c986.93,1758.29) 997.05,1761 ; v2@995.78,1752.68 ccw(c986.93,1758.29) 997.05,1761 ; v2@995.78,1752.68 ccw(c986.93,1758.29) 997.05,1761 ; v2@995.78,1752.68 ccw(c986.93,1758.29) 997.05,1761 ; 996.88,1911.66 ccw(c1008.54,1914.78) v2@1002.5,1904.33 ; 996.88,1911.66 ccw(c1008.54,1914.78) v2@1002.5,1904.33 ; 996.88,1911.66 ccw(c1008.54,1914.78) v2@1002.5,1904.33 ; 996.88,1911.66 ccw(c1008.54,1914.78) v2@1002.5,1904.33 ; 996.88,1911.66 ccw(c1008.54,1914.78) v2@1002.5,1904.33 ; 996.88,1911.66 ccw(c1008.54,1914.78) v2@1002.5,1904.33 ; 996.88,1911.66 ccw(c1008.54,1914.78) v2@1002.5,1904.33 ; 996.88,1911.66 ccw(c1008.54,1914.78) v2@1002.5,1904.33 ; 997.05,1761 ccw(c1007.17,1763.72) v2@1002.32,1754.43 ; 997.05,1761 ccw(c1007.17,1763.72) v2@1002.32,1754.43 ; 997.05,1761 ccw(c1007.17,1763.72) v2@1002.32,1754.43 ; 997.05,1761 ccw(c1007.17,1763.72) v2@1002.32,1754.43 ; 997.05,1761 ccw(c1007.17,1763.72) v2@1002.32,1754.43 ; 997.05,1761 ccw(c1007.17,1763.72) v2@1002.32,1754.43 ; 997.05,1761 ccw(c1007.17,1763.72) v2@1002.32,1754.43 ; 997.05,1761 ccw(c1007.17,1763.72) v2@1002.32,1754.43
  Bottom Layer w30: v6(-5,3530) v6(1000,3530)